# Allegro board pcb.brd
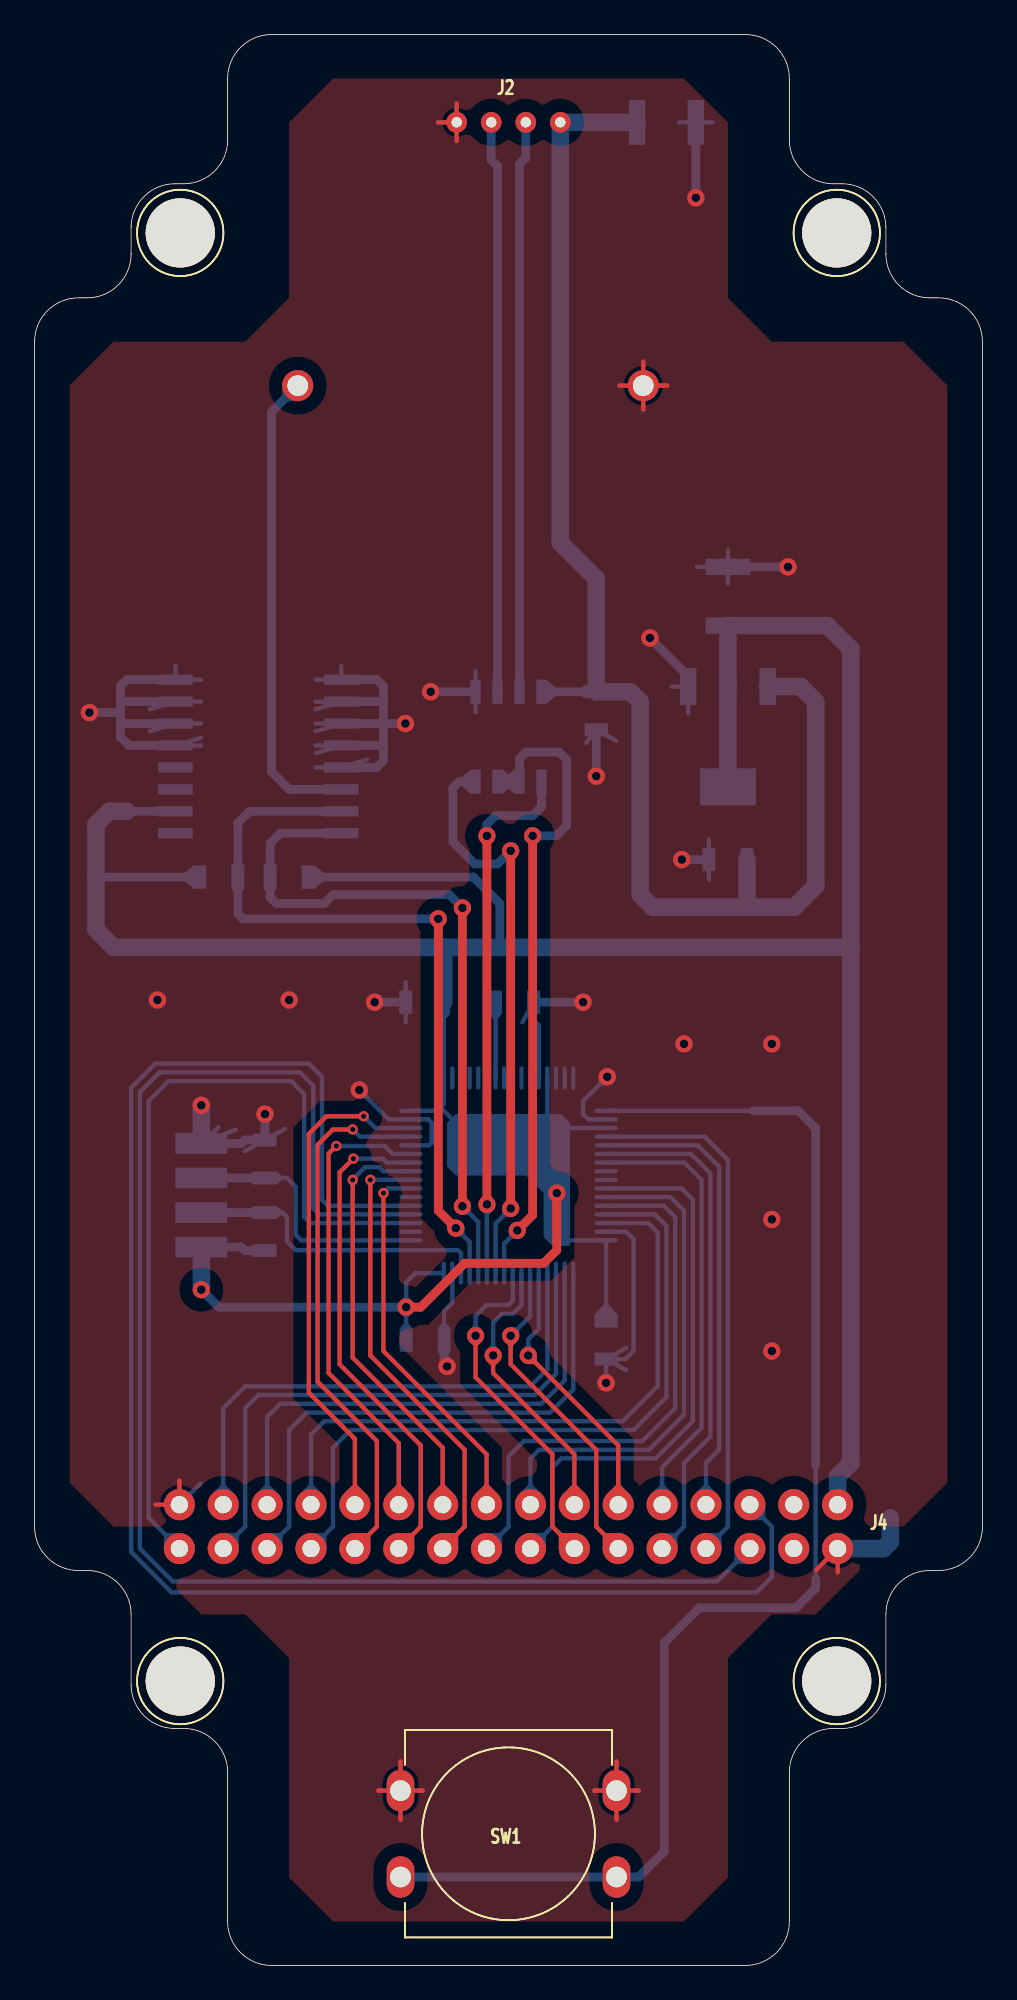
[diagram p0: board, top side]
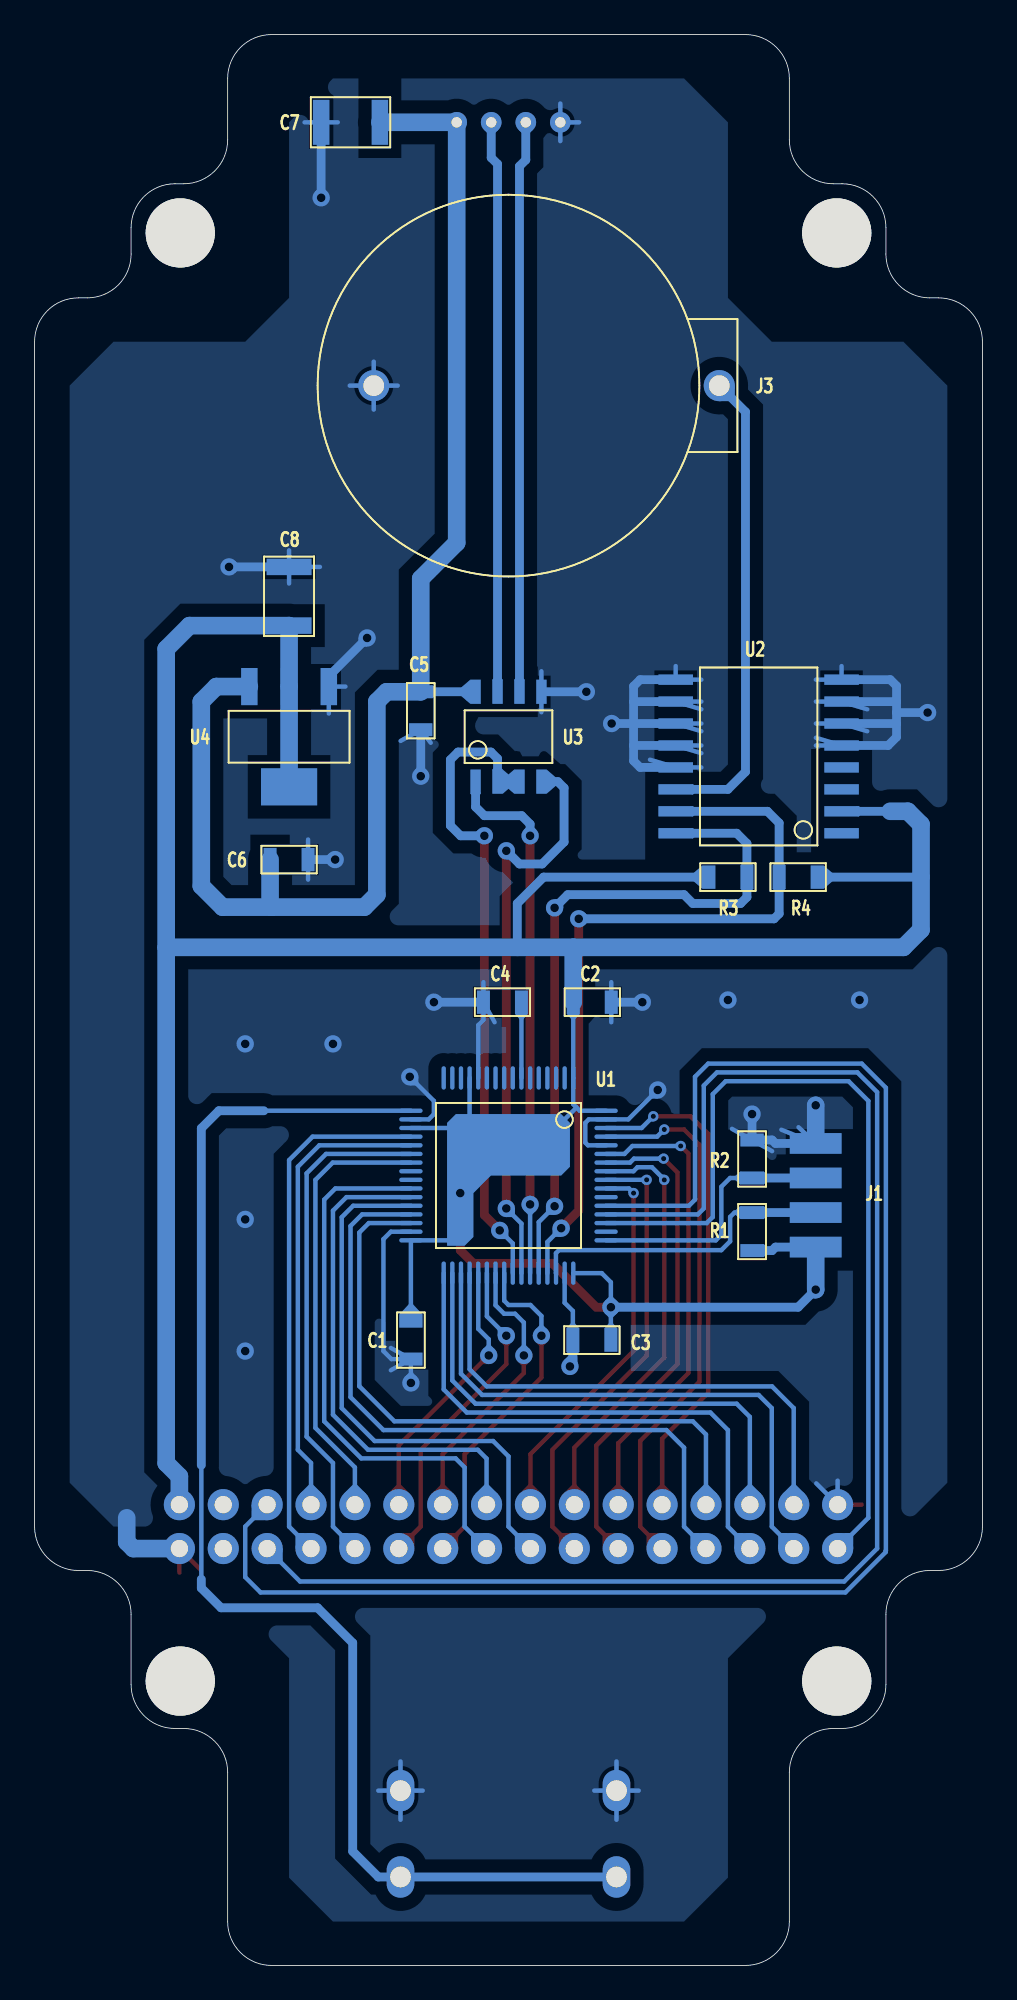
[diagram p1: board, bottom side, seen from below]

Outline 54.86 x 111.76 mm; copper layers: TOP, BOTTOM. Coordinates in mm from the lower left corner of the outline.
Outline path: 0,93.98 arc(0.74,95.78) 2.54,96.52 3.05,96.52 arc(4.84,97.26) 5.59,99.06 5.59,100.58 arc(6.33,102.38) 8.13,103.12 8.64,103.12 arc(10.43,103.87) 11.18,105.66 11.18,109.22 arc(11.92,111.02) 13.72,111.76 41.15,111.76 arc(42.94,111.02) 43.69,109.22 43.69,105.66 arc(44.43,103.87) 46.23,103.12 46.74,103.12 arc(48.53,102.38) 49.28,100.58 49.28,99.06 arc(50.02,97.26) 51.82,96.52 52.32,96.52 arc(54.12,95.78) 54.86,93.98 54.86,25.4 arc(54.12,23.6) 52.32,22.86 51.82,22.86 arc(50.02,22.12) 49.28,20.32 49.28,16.26 arc(48.53,14.46) 46.74,13.72 46.23,13.72 arc(44.43,12.97) 43.69,11.18 43.69,2.54 arc(42.94,0.74) 41.15,0 13.72,0 arc(11.92,0.74) 11.18,2.54 11.18,11.18 arc(10.43,12.97) 8.64,13.72 8.13,13.72 arc(6.33,14.46) 5.59,16.26 5.59,20.32 arc(4.84,22.12) 3.05,22.86 2.54,22.86 arc(0.74,23.6) 0,25.4 0,93.98

## Placement (name value [footprint] x y rotation side)
C1  100n  [C0805L]  33.08 36.2 90 bottom
C2  100n  [C0805L]  22.58 55.75 0 bottom
C3  100n  [C0805L]  22.61 36.2 0 bottom
C4  100n  [C0805L]  27.78 55.75 180 bottom
C5  100n  [C0805L]  32.51 72.62 90 bottom
C6  100n  [C0805L]  40.13 64.01 0 bottom
C7  47u  [C1210L]  36.58 106.68 180 bottom
C8  47u  [C1210L]  40.13 79.25 270 bottom
J1  CON4  [PH200H_4]  9.65 44.58 90 bottom
J2  BJDJ  [SIP200P_4]  27.43 106.68 180 top
J3  BATT  [CR2032_2]  27.43 91.44 180 bottom
J4  TFT  [DIP254P254_32]  27.43 25.4 0 top
NOREF  -  [unnamed]  8.43 100.28 0 top
NOREF#2  -  [unnamed]  46.43 16.46 0 top
NOREF#3  -  [unnamed]  46.43 100.28 0 top
NOREF#4  -  [unnamed]  8.43 16.46 0 top
R1  103  [R0805L]  13.33 42.48 90 bottom
R2  103  [R0805L]  13.33 46.68 270 bottom
R3  103  [R0805L]  14.73 62.99 0 bottom
R4  103  [R0805L]  10.67 62.99 180 bottom
SW1  KEY4  [KEY12X12]  27.43 7.62 0 top
U1  STM32F103RX  [LQFP64]  27.43 45.72 270 bottom
U2  DS3231  [SOIC127P762_16]  12.95 69.98 0 bottom
U3  SN184  [SOIC8]  27.43 71.12 90 bottom
U4  LDO1117  [SOT223]  40.13 71.12 270 bottom

## Library data of the parts
C1-C8 = C
J1 J2 = CON4
J3 = CON2
J4 = DCON32
R1-R4 = R
SW1 = KEY4
U1 = STM32F103RX
U2 = DS3231
U3 = SN184
U4 = LDO1117

## Footprints (pads in the part's own frame, mm; a bottom-side part is the same pattern mirrored in y, then rotated)
C0805L
  rect 0.749x1.349 smd: 1(-1.1,0) 2(1.1,0)
C1210L
  rect 0.95x2.601 smd: 1(-1.699,0) 2(1.699,0)
CR2032_2
  round 1.801 hole 1.199: 1(12.2,0) 2(-7.8,0)
DIP254P254_32
  round 1.801 hole 1.001: 1(-19.05,1.27) 2(-19.05,-1.27) 3(-16.51,1.27) 4(-16.51,-1.27) 5(-13.97,1.27) 6(-13.97,-1.27) 7(-11.43,1.27) 8(-11.43,-1.27) 9(-8.89,1.27) 10(-8.89,-1.27) 11(-6.35,1.27) 12(-6.35,-1.27) 13(-3.81,1.27) 14(-3.81,-1.27) 15(-1.27,1.27) 16(-1.27,-1.27) 17(1.27,1.27) 18(1.27,-1.27) 19(3.81,1.27) 20(3.81,-1.27) 21(6.35,1.27) 22(6.35,-1.27) 23(8.89,1.27) 24(8.89,-1.27) 25(11.43,1.27) 26(11.43,-1.27) 27(13.97,1.27) 28(13.97,-1.27) 29(16.51,1.27) 30(16.51,-1.27) 31(19.05,1.27) 32(19.05,-1.27)
KEY12X12
  oval 1.6x2.4 hole 1.199: 1(-6.251,2.499) 2(6.251,2.499) 3(-6.251,-2.499) 4(6.251,-2.499)
LQFP64
  oval 1.349x0.249 smd: 1(-5.649,3.749) 2(-5.649,3.251) 3(-5.649,2.751) 4(-5.649,2.25) 5(-5.649,1.75) 6(-5.649,1.25) 7(-5.649,0.749) 8(-5.649,0.249) 9(-5.649,-0.249) 10(-5.649,-0.749) 11(-5.649,-1.25) 12(-5.649,-1.75) 13(-5.649,-2.25) 14(-5.649,-2.751) 15(-5.649,-3.251) 16(-5.649,-3.749) 33(5.649,-3.749) 34(5.649,-3.251) 35(5.649,-2.751) 36(5.649,-2.25) 37(5.649,-1.75) 38(5.649,-1.25) 39(5.649,-0.749) 40(5.649,-0.249) 41(5.649,0.249) 42(5.649,0.749) 43(5.649,1.25) 44(5.649,1.75) 45(5.649,2.25) 46(5.649,2.751) 47(5.649,3.251) 48(5.649,3.749)
  oval 0.249x1.349 smd: 17(-3.749,-5.649) 18(-3.251,-5.649) 19(-2.751,-5.649) 20(-2.25,-5.649) 21(-1.75,-5.649) 22(-1.25,-5.649) 23(-0.749,-5.649) 24(-0.249,-5.649) 25(0.249,-5.649) 26(0.749,-5.649) 27(1.25,-5.649) 28(1.75,-5.649) 29(2.25,-5.649) 30(2.751,-5.649) 31(3.251,-5.649) 32(3.749,-5.649) 49(3.749,5.649) 50(3.251,5.649) 51(2.751,5.649) 52(2.25,5.649) 53(1.75,5.649) 54(1.25,5.649) 55(0.749,5.649) 56(0.249,5.649) 57(-0.249,5.649) 58(-0.749,5.649) 59(-1.25,5.649) 60(-1.75,5.649) 61(-2.25,5.649) 62(-2.751,5.649) 63(-3.251,5.649) 64(-3.749,5.649)
PH200H_4
  rect 1.199x3 smd: 1(-3,0) 2(-1.001,0) 3(1.001,0) 4(3,0)
R0805L
  rect 0.749x1.349 smd: 1(-1.1,0) 2(1.1,0)
SIP200P_4
  round 1.199 hole 0.599: 1(-3,0) 2(-1.001,0) 3(1.001,0) 4(3,0)
SOIC8
  rect 1.4x0.599 smd: 1(-2.601,1.905) 2(-2.601,0.635) 3(-2.601,-0.635) 4(-2.601,-1.905) 5(2.601,-1.905) 6(2.601,-0.635) 7(2.601,0.635) 8(2.601,1.905)
SOIC127P762_16
  rect 1.999x0.599 smd: 1(-4.801,4.445) 2(-4.801,3.175) 3(-4.801,1.905) 4(-4.801,0.635) 5(-4.801,-0.635) 6(-4.801,-1.905) 7(-4.801,-3.175) 8(-4.801,-4.445) 9(4.801,-4.445) 10(4.801,-3.175) 11(4.801,-1.905) 12(4.801,-0.635) 13(4.801,0.635) 14(4.801,1.905) 15(4.801,3.175) 16(4.801,4.445)
SOT223
  rect 2.149x0.95 smd: 1(-2.901,2.301) 2(-2.901,0) 3(-2.901,-2.301)
  rect 2.149x3.251 smd: 4(2.901,0)
unnamed
  round 4 hole 4 unplated: (0,0)

## Nets
3V3: C1.2 C2.2 C3.1 C8.2 J1.1 J4.31 R1.1 R3.2 R4.2 U1.1(VBAT) U1.13(VDDA) U1.19(VDD_4) U1.32(VDD_1) U1.48(VDD_2) U1.64(VDD_3) U2.2(VCC) U4.2(VO) U4.4(VOP)
5V: C5.2 C6.2 C7.2 J2.1 U3.8(VCC) U4.3(VI)
GND: C1.1 C2.1 C3.2 C4.1 C5.1 C6.1 C7.1 C8.1 J1.4 J2.4 J3.2 J4.1 J4.32 R2.1 SW1.1 SW1.2 U1.12(VSSA) U1.18(VSS_4) U1.31(VSS_1) U1.47(VSS_2) U1.60(BOOT0) U1.63(VSS_3) U2.5(NC1) U2.6(NC2) U2.7(NC3) U2.8(NC4) U2.9(NC5) U2.10(NC6) U2.11(NC7) U2.12(NC8) U2.13(GND) U3.5(GND) U4.1(GND)
VBATT: J3.1 U2.14(VBAT)
485A: J2.3 U3.6(A)
485B: J2.2 U3.7(B)
485DE: U1.41(PA8/MCO/TIM1_CH1) U3.2(R\E\) U3.3(DE)
BKL: J4.28 U1.52(PC11)
CLK: J4.23 U1.23(PA7/SPI1_MOSI/ADC1_IN7)
CS: J4.24 U1.22(PA6/SPI1_MISO/ADC1_IN6)
INT: J4.27 U1.53(PC12)
KEY: SW1.3 SW1.4 U1.17(PA3/USART2_RX/ADC1_IN3)
LCD00: J4.18 U1.26(PB0/ADC1_IN8)
LCD01: J4.17 U1.27(PB1/ADC1_IN9)
LCD02: J4.16 U1.28(PB2)
LCD03: J4.15 U1.55(PB3)
LCD04: J4.14 U1.56(PB4)
LCD05: J4.13 U1.57(PB5/I2C1_SMBAI)
LCD06: J4.12 U1.58(PB6/I2C1_SCL)
LCD07: J4.11 U1.59(PB7/I2C1_SDA)
LCD08: J4.10 U1.61(PB8)
LCD09: J4.9 U1.62(PB9)
LCD10: J4.8 U1.29(PB10)
LCD11: J4.7 U1.30(PB11)
LCD12: J4.6 U1.33(PB12/TIM1_BKIN)
LCD13: J4.5 U1.34(PB13/TIM1_CH1N)
LCD14: J4.4 U1.35(PB14/TIM1_CH2N)
LCD15: J4.3 U1.36(PB15/TIM1_CH3N)
LCDCS: J4.22 U1.38(PC7)
LCDRD: J4.19 U1.39(PC8)
LCDRS: J4.21 U1.37(PC6)
LCDRST: J4.2 U1.51(PC10)
LCDWR: J4.20 U1.40(PC9)
MISO: J4.26 U1.20(PA4/SPI1_NSS/ADC1_IN4)
MOSI: J4.25 U1.21(PA5/SPI1_SCK/ADC1_IN5)
RXD1: U1.43(PA10/USART1_RX/TIM1_CH3) U3.1(R)
SCL: R3.1 U1.44(PA11/USBDM/TIM1_CH4) U2.16(SCL)
SDA: R4.1 U1.45(PA12/USBDP/TIM1_ETR) U2.15(SDA)
SWCLK: J1.3 R2.2 U1.49(PA14/SWCLK)
SWDIO: J1.2 R1.2 U1.46(PA13/SWDIO)
TXD1: U1.42(PA9/USART1_TX/TIM1_CH2) U3.4(D)
N932410: C4.2 U1.7(NRST)

Pads without a net: J4 29 30; U1 2 3 4 5 6 8 9 10 11 14 15 16 24 25 50 54; U2 1 3 4

## Via types
v1: diameter 1.001, hole 0.5, TOP to BOTTOM, 39 vias
v2: diameter 0.599, hole 0.3, TOP to BOTTOM, 7 vias

## Routing (per net, layer and track width the routed paths; a pad name or vN(x,y) marks a point on that pad's centre or on a via; arc(x,y) is an arc through that point)
3V3: length 204.8
  TOP w0.508: v1(21.51,38.1) 22.35,38.1 24.89,40.64 29.46,40.64 30.23,41.4 v1(30.23,44.7)
  BOTTOM w0.254: 24.38,48.77 23.52,49.63 23.52,49.68 ; U1.19 30.48,48.47 ; C1.2 U1.32 30.48,41.97 ; C2.2 U1.1 23.68,49.84 23.52,49.68 ; U1.13 29.68,48.77 ; U1.48 22.04,40.07 21.51,39.54 v1(21.51,38.1) C3.1 ; 23.52,49.68 23.31,49.47 U1.64
  BOTTOM w0.508: v1(9.65,39.12) 10.67,38.1 v1(21.51,38.1) ; R1.1 12.18,41.38 11.98,41.58 J1.1 ; R4.2 3.56,62.99 ; U2.2 5.33,66.8 ; 26.92,58.93 26.92,61.47 25.4,62.99 R3.2
  BOTTOM w1.016: 23.68,58.93 47.24,58.93 ; 23.68,58.93 C2.2 ; 23.68,58.93 4.57,58.93 3.56,59.94 3.56,66.04 4.32,66.8 5.33,66.8 ; U4.4 U4.2 C8.2 45.9,77.55 47.24,76.2 47.24,58.93 ; 47.24,58.93 47.24,29.07 46.48,28.31 J4.31 ; J1.1 v1(9.65,39.12)
5V: length 83
  BOTTOM w0.508: 29.34,73.72 C5.2
  BOTTOM w1.016: 41.15,61.25 41.23,61.34 C6.2 ; 41.15,61.25 43.98,61.25 45.21,62.48 45.21,73.15 44.34,74.02 U4.3 ; 41.15,61.25 35.77,61.25 35.05,61.98 35.05,73.15 34.48,73.72 C5.2 32.51,80.26 30.43,82.34 J2.1 C7.2
GND: length 209.2
  TOP w0.254: 46.48,22.74 J4.32 45.25,22.9 ; 7,26.67 J4.1 8.38,28.06 ; J2.4 24.43,107.76 ; J2.4 23.35,106.68 ; J2.4 24.43,105.6 ; 35.23,90.05 J3.2 ; J3.2 36.62,91.44 ; J3.2 35.23,92.83 ; J3.2 33.85,91.44 ; 21.18,8.43 SW1.1 ; SW1.1 19.9,10.12 ; SW1.1 21.18,11.81 ; SW1.1 22.47,10.12 ; SW1.2 34.97,10.12 ; SW1.2 32.4,10.12 ; SW1.2 33.68,11.81 ; SW1.2 33.68,8.43
  BOTTOM w0.254: 24.43,105.6 J2.4 ; J2.4 23.35,106.68 ; J2.4 24.43,107.76 ; 9.64,70.61 U2.5 9.64,71.06 ; 31.93,70.77 C5.1 33.67,70.88 ; U1.60 22.83,47.47 22.99,47.62 22.99,48.77 22.78,48.97 U1.63 20.5,48.97 v1(18.8,50.67) ; 16.27,69.34 U2.13 19.24,69.79 ; 21.18,8.43 SW1.1 ; SW1.1 21.18,11.81 ; SW1.1 22.47,10.12 ; SW1.1 19.9,10.12 ; J3.2 35.23,92.83 ; J3.2 36.62,91.44 ; J3.2 35.23,90.05 ; J3.2 33.85,91.44 ; 38.35,80.95 C8.1 ; C8.1 40.13,81.91 ; C8.1 40.13,79.99 ; C1.1 34.21,35.1 34.67,35.56 34.67,42.04 34.24,42.47 U1.31 ; C1.1 34.24,35.74 ; C1.1 v1(33.08,33.72) ; C1.1 34.24,34.45 ; v1(33.15,51.44) 31.75,50.04 31.75,49.27 32.05,48.97 U1.18 ; 32.4,10.12 SW1.2 ; SW1.2 34.97,10.12 ; SW1.2 33.68,8.43 ; SW1.2 33.68,11.81 ; 39.03,65.17 C6.1 39.03,62.85 ; 16.27,74.42 U2.9 17.75,75.21 ; 21.48,56.91 C2.1 21.48,54.59 ; 16.27,71.43 U2.11 16.27,71.88 ; U1.12 29.18,54.42 28.88,54.72 C4.1 ; 16.27,70.61 U2.12 16.27,70.16 ; 12.17,47.13 R2.1 14.5,48.42 ; U1.47 24.18,38.35 23.71,37.88 C3.2 ; 25.53,74.91 U3.5 25.53,72.53 ; 16.27,72.7 U2.10 16.27,73.15 ; 6.67,72.7 U2.7 9.64,73.15 ; 37.32,106.68 C7.1 39.24,106.68 ; 37.83,72.46 U4.1 36.87,74.02 ; 6.67,71.43 U2.6 9.64,71.88 ; C4.1 28.88,56.91 ; C4.1 28.24,54.59 ; 8.15,75.21 U2.8 9.64,74.42 ; 8.38,28.06 J4.1 9.62,27.9 ; 10.65,48.52 J1.4 11.64,48.37
  BOTTOM w0.508: 4.97,71.88 4.97,72.52 ; 4.97,71.88 U2.6 ; 4.97,71.88 4.97,71.1 5.46,70.61 U2.5 ; 4.97,72.52 4.97,73.15 ; 4.97,72.52 v1(3.17,72.52) ; U2.13 19.81,69.34 20.19,69.72 20.19,70.61 ; C2.1 v1(19.68,55.75) ; U4.1 37.83,74.62 v1(35.62,76.84) ; 4.97,73.15 U2.7 ; 4.97,73.15 4.97,74.06 5.33,74.42 U2.8 ; U2.9 19.81,74.42 20.19,74.04 20.19,73.15 ; C5.1 v1(32.51,68.83) ; 20.19,70.61 20.19,71.88 ; 20.19,70.61 U2.12 ; 20.19,71.88 U2.11 ; 20.19,71.88 v1(21.46,71.88) ; 20.19,71.88 20.19,73.15 ; C6.1 v1(37.46,64.01) ; C8.1 v1(43.61,80.95) ; C7.1 v1(38.28,102.31) ; v1(13.33,49.28) R2.1 12.18,47.78 11.98,47.58 J1.4 ; 20.19,73.15 U2.10 ; U3.5 v1(22.93,73.72) ; C4.1 v1(31.75,55.75) ; v1(23.88,34.67) 23.71,34.84 C3.2
  BOTTOM w1.016: J4.32 49.15,24.13 49.53,24.51 49.53,25.91 ; J1.4 v1(9.65,49.78)
  vias: v1(7.11,55.88) v1(14.73,55.88) v1(37.59,53.34) v1(42.67,53.34) v1(42.67,43.18) v1(42.67,35.56)
VBATT: length 27.4
  BOTTOM w0.508: J3.1 13.72,89.92 13.72,69.09 14.73,68.07 U2.14
485A: length 33.1
  BOTTOM w0.508: 26.8,73.72 26.8,104.14 26.43,104.51 J2.3
485B: length 33.1
  BOTTOM w0.508: J2.2 28.43,104.63 28.07,104.27 U3.7
485DE: length 37.7
  TOP w0.508: v1(28.83,65.38) 28.83,43.43 v1(27.94,42.55)
  BOTTOM w0.254: U1.41 27.18,41.79 v1(27.94,42.55)
  BOTTOM w0.508: v1(28.83,65.38) 30.21,65.38 30.8,65.98 30.8,69.79 30.35,70.23 28.45,70.23 28.07,69.85 28.07,68.52 U3.3
BKL: length 87
  BOTTOM w0.254: J4.28 39.5,22.23 8,22.23 6.1,24.13 6.1,50.55 7.24,51.69 15.37,51.69 16.13,50.93 16.13,43.82 16.47,43.47 U1.52
CLK: length 25.7
  BOTTOM w0.254: J4.23 36.32,28.83 38.61,31.12 38.61,45.47 37.6,46.47 U1.23
CS: length 29.4
  BOTTOM w0.254: J4.24 37.59,25.4 37.59,29.08 39.12,30.61 39.12,45.85 37.99,46.97 U1.22
INT: length 94.4
  BOTTOM w0.254: J4.27 42.67,25.4 42.67,22.48 41.78,21.59 7.93,21.59 5.6,23.92 5.6,23.99 5.59,24 5.59,50.8 6.98,52.2 15.87,52.2 16.64,51.44 16.64,44.32 16.99,43.97 U1.53
KEY: length 77.2
  BOTTOM w0.254: 45.21,22.35 45.21,28.96 ; 41.6,49.47 U1.17
  BOTTOM w0.508: SW1.3 SW1.4 34.97,5.12 36.45,6.6 36.45,18.67 38.48,20.7 44.07,20.7 45.21,21.84 45.21,22.35 ; 45.21,28.96 45.21,48.45 44.2,49.47 41.6,49.47
LCD00: length 32.6
  BOTTOM w0.254: J4.18 29.97,25.4 29.97,28.83 30.49,29.35 35.95,29.35 38.1,31.5 38.1,44.32 37.45,44.97 U1.26
LCD01: length 29.3
  BOTTOM w0.254: U1.27 36.81,44.47 37.59,43.69 37.59,31.88 35.56,29.85 29.21,29.85 28.7,29.34 J4.17
LCD02: length 32
  BOTTOM w0.254: U1.28 36.42,43.97 37.08,43.31 37.08,32.26 35.18,30.35 28.32,30.35 27.43,29.46 27.43,25.4 J4.16
LCD03: length 22.2
  TOP w0.254: v2(20.19,44.7) 20.19,35.56 26.16,29.59 J4.15
  BOTTOM w0.254: U1.55 20.46,44.97 v2(20.19,44.7)
LCD04: length 26.5
  TOP w0.254: v2(19.44,45.47) 19.44,35.3 24.89,29.85 24.89,25.4 J4.14
  BOTTOM w0.254: v2(19.44,45.47) U1.56
LCD05: length 24.7
  TOP w0.254: v2(18.41,45.47) 18.41,35.18 23.62,29.97 J4.13
  BOTTOM w0.254: U1.57 20.2,45.97 19.96,46.2 19.13,46.2 18.41,45.49 v2(18.41,45.47)
LCD06: length 28.8
  TOP w0.254: v2(18.45,46.7) 17.65,45.9 17.65,34.8 22.35,30.1 22.35,25.4 J4.12
  BOTTOM w0.254: v2(18.45,46.7) 20.17,46.7 20.4,46.47 U1.58
LCD07: length 27.1
  TOP w0.254: J4.11 21.08,30.23 17.02,34.29 17.02,46.99 17.46,47.43 v2(17.47,47.43)
  BOTTOM w0.254: v2(17.47,47.43) 20.26,47.43 20.72,46.97 U1.59
LCD08: length 31.3
  TOP w0.254: v2(18.41,48.39) 17.27,48.39 16.38,47.5 16.38,33.78 19.81,30.35 19.81,25.4 J4.10
  BOTTOM w0.254: U1.61 18.83,47.97 v2(18.41,48.39)
LCD09: length 29.2
  TOP w0.254: J4.9 18.54,30.48 15.87,33.15 15.87,48.13 16.89,49.15 v2(19.05,49.15)
  BOTTOM w0.254: v2(19.05,49.15) 19.73,48.47 U1.62
LCD10: length 40.6
  BOTTOM w0.254: U1.29 35.91,43.47 36.58,42.8 36.58,32.89 34.67,30.99 18.29,30.99 17.27,29.97 17.27,25.4 J4.8
LCD11: length 37.4
  BOTTOM w0.254: J4.7 16,30.73 16.76,31.5 34.04,31.5 36.07,33.53 36.07,42.42 35.52,42.97 U1.30
LCD12: length 31.5
  BOTTOM w0.254: U1.33 31.18,33.34 29.84,32 15.75,32 14.73,30.99 14.73,25.4 J4.6
LCD13: length 29.4
  BOTTOM w0.254: U1.34 30.68,33.86 29.34,32.51 14.22,32.51 13.46,31.75 J4.5
LCD14: length 33.3
  BOTTOM w0.254: U1.35 30.18,34.25 28.96,33.02 12.95,33.02 12.19,32.26 12.19,25.4 J4.4
LCD15: length 30.8
  BOTTOM w0.254: J4.3 10.92,32.26 12.18,33.52 28.69,33.52 29.68,34.51 U1.36
LCDCS: length 19
  TOP w0.254: J4.22 32.51,25.4 32.51,29.85 27.56,34.8 v1(27.56,36.45)
  BOTTOM w0.254: U1.38 28.68,37.57 v1(27.56,36.45)
LCDRD: length 16.4
  TOP w0.254: J4.19 31.24,29.59 26.54,34.29 v1(26.54,35.31)
  BOTTOM w0.254: U1.39 28.18,38.21 27.69,37.72 27.05,37.72 26.54,37.21 v1(26.54,35.31)
LCDRS: length 15.8
  TOP w0.254: v1(28.57,35.31) 33.78,30.1 J4.21
  BOTTOM w0.254: v1(28.57,35.31) 28.57,36.24 29.18,36.85 U1.37
LCDRST: length 49.9
  BOTTOM w0.254: U1.51 15.96,42.97 15.61,43.32 15.61,50.43 14.86,51.18 7.75,51.18 6.6,50.04 6.6,25.91 J4.2
LCDWR: length 19.9
  TOP w0.254: v1(25.53,36.45) 25.53,34.04 29.97,29.59 29.97,25.4 J4.20
  BOTTOM w0.254: U1.40 27.68,38.48 27.43,38.23 26.16,38.23 25.53,37.59 v1(25.53,36.45)
MISO: length 30.6
  BOTTOM w0.254: J4.26 40.13,25.4 40.13,46.61 38.77,47.97 U1.20
MOSI: length 26.9
  BOTTOM w0.254: J4.25 38.86,29.08 39.62,29.85 39.62,46.23 38.38,47.47 U1.21
RXD1: length 31
  TOP w0.508: v1(26.18,65.38) v1(26.18,44.05)
  BOTTOM w0.254: U1.43 v1(26.18,44.05)
  BOTTOM w0.508: v1(26.18,65.38) 26.18,66.06 26.67,66.55 28.83,66.55 29.34,67.06 U3.1
SCL: length 40.8
  TOP w0.508: v1(24.77,43.94) v1(24.77,61.21)
  BOTTOM w0.254: U1.44 25.68,43.03 v1(24.77,43.94)
  BOTTOM w0.508: U2.16 14.22,65.53 13.63,64.94 R3.1 13.63,61.83 14,61.47 16.76,61.47 17.27,61.98 24,61.98 v1(24.77,61.21)
SDA: length 44.5
  TOP w0.508: v1(23.37,60.58) 23.37,43.69 v1(24.38,42.67)
  BOTTOM w0.254: U1.45 25.18,41.87 v1(24.38,42.67)
  BOTTOM w0.508: v1(23.37,60.58) 12.06,60.58 11.77,60.88 R4.1 11.77,66.12 12.45,66.8 U2.15
SWCLK: length 15.3
  BOTTOM w0.254: U1.49 15.43,41.97 15.11,42.29 15.11,45.07 14.6,45.58 R2.2
  BOTTOM w0.508: J1.3 R2.2
SWDIO: length 18
  BOTTOM w0.254: U1.46 24.69,40.08 24.69,41.23 24.51,41.4 15.11,41.4 14.6,41.91 14.6,43.32 14.35,43.58 R1.2
  BOTTOM w0.508: J1.2 R1.2
TXD1: length 33.6
  TOP w0.508: v1(27.56,43.82) v1(27.56,64.52)
  BOTTOM w0.254: v1(27.56,43.82) 26.68,42.94 U1.42
  BOTTOM w0.508: v1(27.56,64.52) 26.8,63.75 25.49,63.75 24.22,65.02 24.22,68.16 24.58,68.52 25.53,68.52
N932410: length 4.4
  BOTTOM w0.254: U1.7 26.68,55.75

## Copper pours and planes (outline as drawn; the poured copper is in the pictures)
3V3 on BOTTOM (solid shape): 30.99,48.77 30.99,41.66 29.97,41.66 29.46,42.16 29.46,44.7 28.45,45.72 24.38,45.72 23.88,46.23 23.88,48.77 24.38,49.28 30.48,49.28
GND on TOP: 17.27,109.22 37.59,109.22 40.13,106.68 40.13,96.52 42.67,93.98 50.29,93.98 52.83,91.44 52.83,27.94 50.29,25.4 47.75,25.4 47.75,22.86 45.21,20.32 42.67,20.32 40.13,17.78 40.13,5.08 37.59,2.54 17.27,2.54 14.73,5.08 14.73,17.78 12.19,20.32 9.65,20.32 7.11,22.86 7.11,25.4 4.57,25.4 2.03,27.94 2.03,91.44 4.57,93.98 12.19,93.98 14.73,96.52 14.73,106.68
GND on BOTTOM: 17.27,109.22 37.59,109.22 40.13,106.68 40.13,96.52 42.67,93.98 50.29,93.98 52.83,91.44 52.83,27.94 50.29,25.4 47.75,25.4 47.75,22.86 45.21,20.32 42.67,20.32 40.13,17.78 40.13,5.08 37.59,2.54 17.27,2.54 14.73,5.08 14.73,17.78 12.19,20.32 9.65,20.32 7.11,22.86 7.11,25.4 4.57,25.4 2.03,27.94 2.03,91.44 4.57,93.98 12.19,93.98 14.73,96.52 14.73,106.68 ; 4 cut-outs
3V3 on BOTTOM (solid shape): 33,38.31 33.08,38.34 33.16,38.31 33.76,37.67 33.08,37.26 32.41,37.67
3V3 on BOTTOM (solid shape): 9.63,62.99 9.19,62.32 8.56,62.86 8.52,62.99 8.56,63.13 9.19,63.67
3V3 on BOTTOM (solid shape): 16.84,63.13 16.88,62.99 16.84,62.86 16.21,62.32 15.77,62.99 16.21,63.67
5V on BOTTOM (solid shape): 30.29,73.86 30.33,73.72 30.29,73.59 29.64,73.02 29.27,73.72 29.64,74.42
485DE on BOTTOM (solid shape): 27.75,68.65 27.79,68.52 27.75,68.38 27.1,67.82 26.73,68.52 27.1,69.22
485DE on BOTTOM (solid shape): 28.13,68.52 27.77,67.82 27.11,68.38 27.07,68.52 27.11,68.66 27.77,69.22
CLK on BOTTOM (solid shape): 36.23,27.85 36.32,27.89 36.41,27.85 36.96,27.31 36.32,26.64 35.69,27.31
LCD01 on BOTTOM (solid shape): 28.61,27.85 28.7,27.89 28.79,27.85 29.34,27.31 28.7,26.64 28.07,27.31
LCD03 on TOP (solid shape): 26.07,27.85 26.16,27.89 26.25,27.85 26.8,27.31 26.16,26.64 25.53,27.31
LCD05 on TOP (solid shape): 23.53,27.85 23.62,27.89 23.71,27.85 24.26,27.31 23.62,26.64 22.99,27.31
LCD07 on TOP (solid shape): 20.99,27.85 21.08,27.89 21.17,27.85 21.72,27.31 21.08,26.64 20.45,27.31
LCD09 on TOP (solid shape): 18.45,27.85 18.54,27.89 18.63,27.85 19.18,27.31 18.54,26.64 17.91,27.31
LCD11 on BOTTOM (solid shape): 15.91,27.85 16,27.89 16.09,27.85 16.64,27.31 16,26.64 15.37,27.31
LCD13 on BOTTOM (solid shape): 13.37,27.85 13.46,27.89 13.55,27.85 14.1,27.31 13.46,26.64 12.83,27.31
LCD15 on BOTTOM (solid shape): 10.83,27.85 10.92,27.89 11.01,27.85 11.56,27.31 10.92,26.64 10.29,27.31
LCDRD on TOP (solid shape): 31.15,27.85 31.24,27.89 31.33,27.85 31.88,27.31 31.24,26.64 30.61,27.31
LCDRS on TOP (solid shape): 33.69,27.85 33.78,27.89 33.87,27.85 34.42,27.31 33.78,26.64 33.15,27.31
MOSI on BOTTOM (solid shape): 38.77,27.85 38.86,27.89 38.95,27.85 39.5,27.31 38.86,26.64 38.23,27.31
TXD1 on BOTTOM (solid shape): 25.59,68.52 25.23,67.82 24.57,68.38 24.53,68.52 24.57,68.65 25.23,69.22

Small or netless copper shapes (teardrops, artwork), in the pictures only: 28 on TOP, 76 on BOTTOM

## Text on the board
NCLEGEND-1-2: FIGURE | SIZE | 47.2 | 39.4 | 23.6 | 19.7 | 11.8 | 157.5 | DRILL CHART: TOP to BOTTOM | ALL UNITS ARE IN MILS | PLATED | NON-PLATED | QTY | 2 | 4 | 32 | 39 | 7
